# Altium PCB PCB1.PcbDoc
Units mil, origin at the board's own origin, x right, y up, seen from the top; angles counter-clockwise.
Board outline 3015.03 x 3555.03 mil, 2 copper layers (Top Layer, Bottom Layer); 31 components, 31 nets, 145 pads, 24 vias.
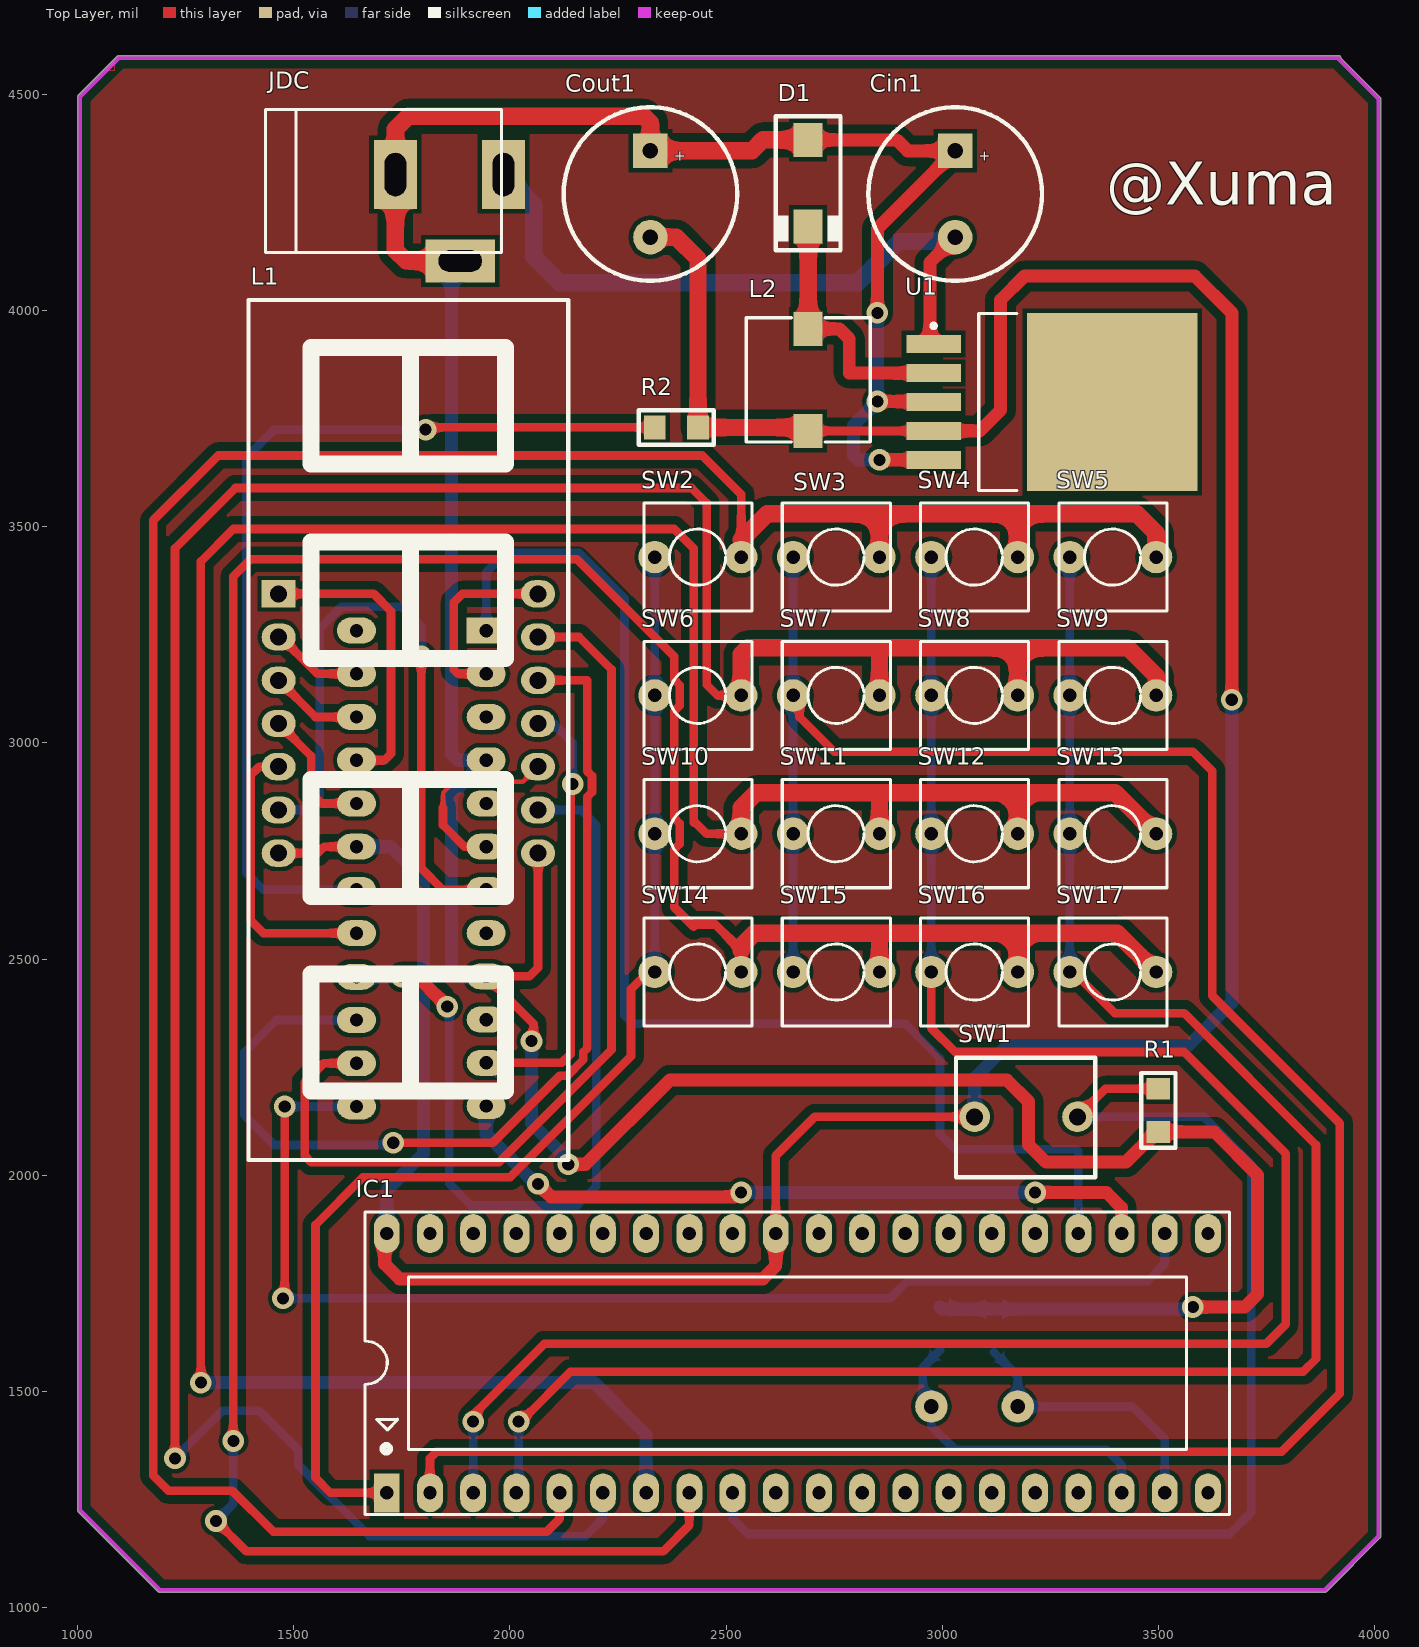
[diagram p0: Top Layer view]
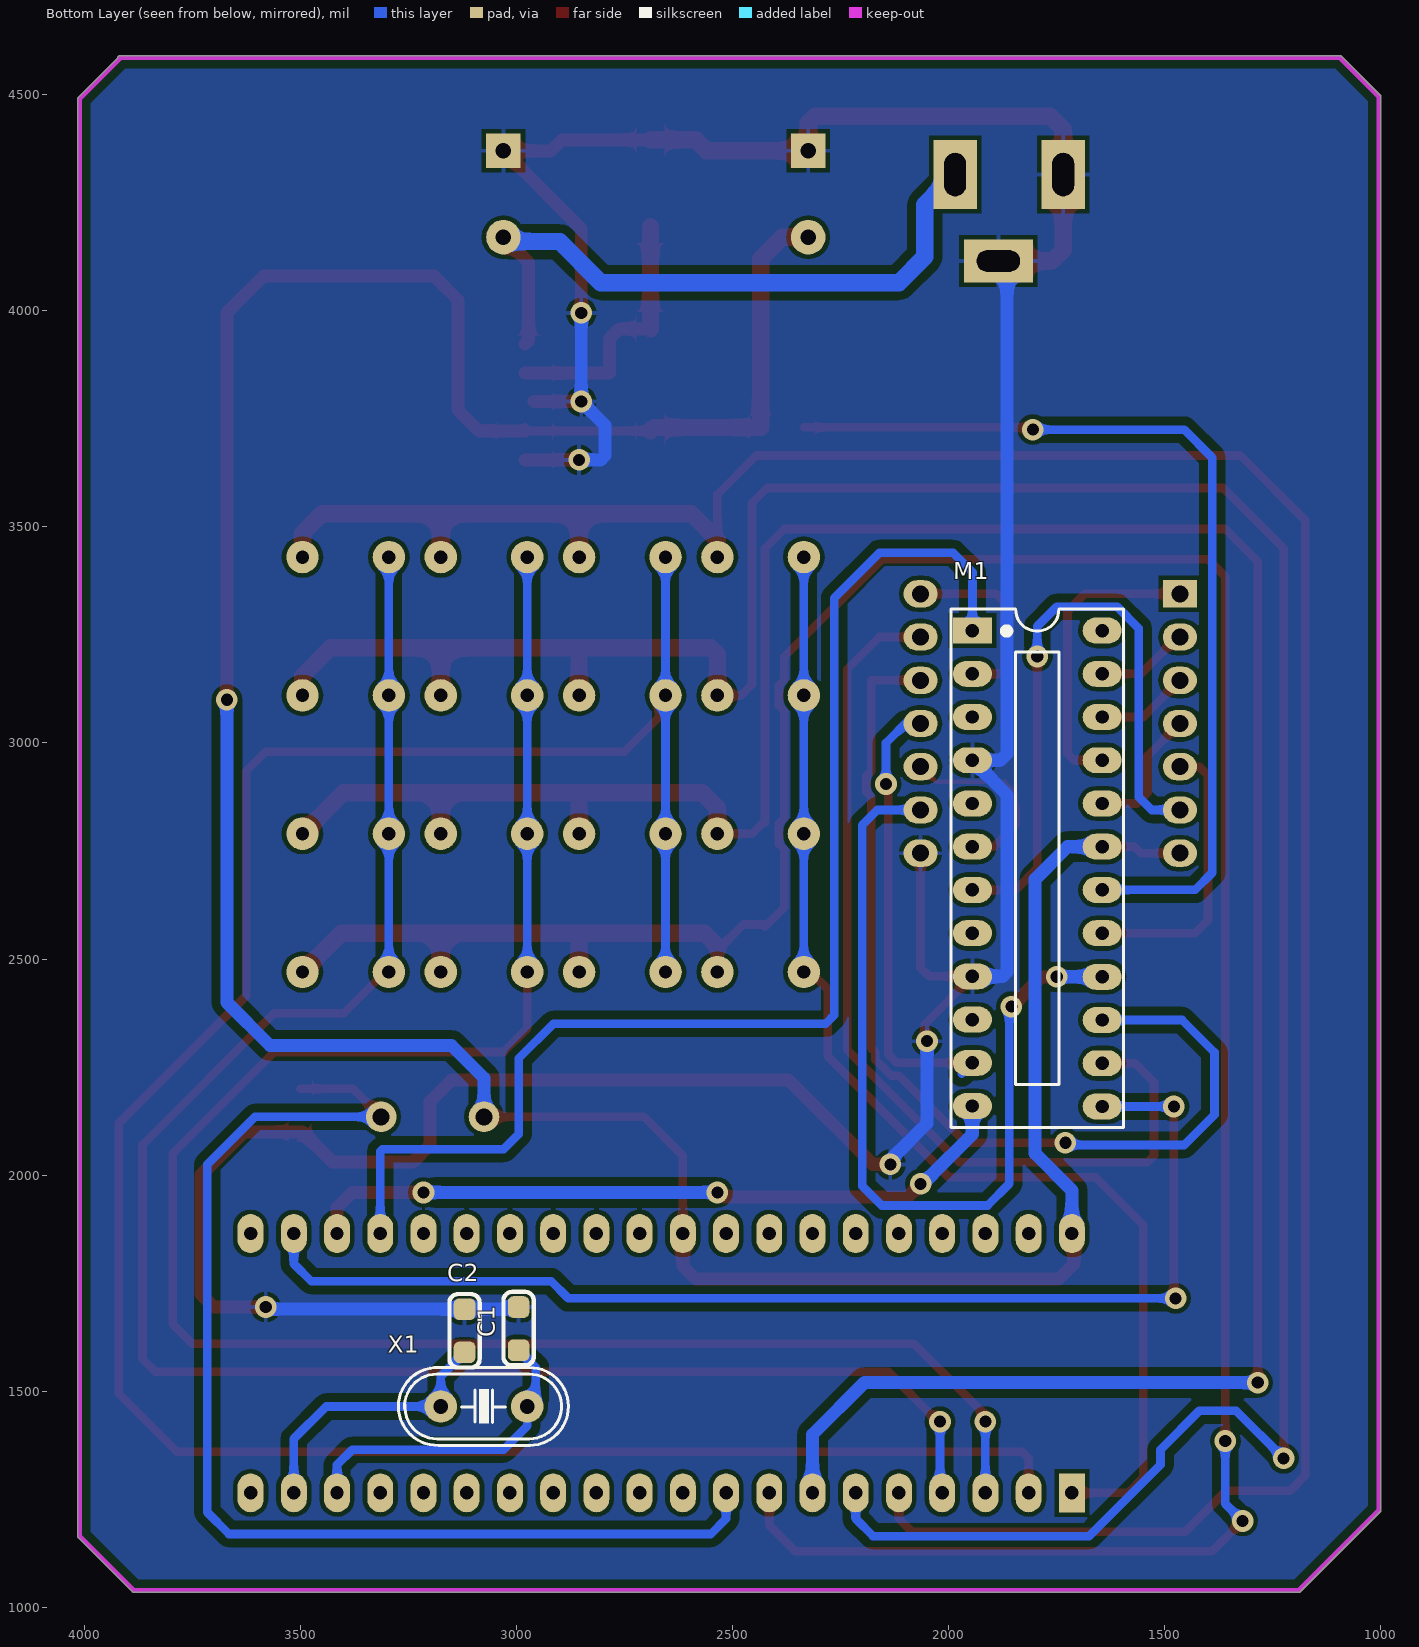
[diagram p1: Bottom Layer view, seen from below]

## Layer stack, top to bottom
Top Solder: solder mask 0.4, Solder Resist, Dk 3.5
Top Layer: signal copper 1.4
Dielectric 1: dielectric 12.6, FR-4, Dk 4.8
Bottom Layer: signal copper 1.4
Bottom Solder: solder mask 0.4, Solder Resist, Dk 3.5

## Board outline
1001.47,1221.44 cw(c1005,1225) 999.99,1225 999.98,4495 cw(c1005,4495) 1001.48,4498.57 1001.45,4498.55 1091.45,4588.55 1091.44,4588.53 cw(c1095,4585) 1095,4590.02 3917.5,4590.02 cw(c3917.5,4585) 3922.51,4585 cw(c3917.5,4585) 3922.5,4584.59 4013.55,4493.55 4013.53,4493.56 cw(c4010,4490) 4015.01,4490 4015.01,1165 cw(c4010,1165) 4013.53,1161.44 4013.55,1161.45 3888.55,1036.45 3888.56,1036.47 cw(c3885,1040) 3885,1034.98 1190,1034.98 cw(c1190,1040) 1186.44,1036.47 1186.45,1036.45

## Design rules (kind name [scope] priority, off if disabled: settings)
Clearance [All] p1: gap=10 ignorepadtopadclearanceinfootprint=FALSE except(0: Arc-Hole Track-Hole SMDPad-Hole THPad-Hole Via-Hole Fill-Hole Poly-Hole Region-Hole Text-Hole; 7: Arc-Arc Arc-Track Arc-SMDPad Track-Track Track-SMDPad; 20: Arc-Fill Arc-Poly Arc-Region Arc-Text Track-Fill Track-Poly Track-Region Track-Text SMDPad-Text THPad-Text Via-Text Fill-Text Poly-Text Region-Text Text-Text)
PolygonConnect [All] p1: connectstyle=Relief reliefconductorwidth=10 reliefentries=4 polygonreliefangle="90 Angle" airgapwidth=10
RoutingVias [All] p1: holewidth=28 width=50 viastyle="Through Hole" minholewidth=28 minwidth=50 maxholewidth=28 maxwidth=50
SolderMaskExpansion [All] p1: expansion=4
Width [All] p1: maxlimit=40 minlimit=10 preferedwidth=30
30 further rules are at their usual default settings.

## Classes and differential pairs
component class Designator: SW2 SW3 SW5 SW6 SW7 SW8 SW9 SW10 SW11 SW12 SW13 SW14 SW15 SW16 SW17
component class "[05] - POWER": Cin1 Cout1 D1 JDC L2 U1
component class "[03] - LED7SEG": L1 R2
component class "[02] - MCU": C1 C2 IC1 R1 SW1 X1

## Components (designator, comment, footprint, x,y, rotation, side; value= is the part's Value field where it differs from the comment)
C1 "22pF" CAP_0805 2995,1645 r270 bottom value=103
C2 "22pF" CAP_0805 3120,1640 r270 bottom value=103
Cin1 "680uF" CAP_D10 3030,4370 r270 top value=100pF
Cout1 "220uF" CAP_D10 2325,4370 r270 top value=100pF
D1 "1N5822" SMA 2690,4295.16 r270 top value="Diode c?m 1N5408"
IC1 "AT89C52" DIP40/W0.6 1715,1265 r0 top
JDC "Jac DC" DC-IN 1860,4215 r0 top
L1 "Led 7 Seg 4 digit - Anode" LED7SEG-4-0.56-RG 1760,3025 r270 top
L2 "33uH" L-SMD-M-7.3x4.5 2690,3840 r0 top value="150 mH"
M1 "MAX7219ENG" DIP24/W0.3 1945,3260 r270 bottom
R1 "10k" RES_SMD_0805 3500,2150 r90 top value="R1W - 100"
R2 "10k" RES_SMD_0805 2385,3730 r0 top value="R1/4W - 1K"
SW1 "SW-2P-S" SW-2P-S 3313,2035 r180 top
SW2 "SW" SW2 2335,3430 r0 top value="SW chip 2 pin"
SW3 "SW" SW2 2655,3430 r0 top value="SW chip 2 pin"
SW4 "SW" SW2 2975,3430 r0 top value="SW chip 2 pin"
SW5 "SW" SW2 3295,3430 r0 top value="SW chip 2 pin"
SW6 "SW" SW2 2335,3110 r0 top value="SW chip 2 pin"
SW7 "SW" SW2 2655,3110 r0 top value="SW chip 2 pin"
SW8 "SW" SW2 2975,3110 r0 top value="SW chip 2 pin"
SW9 "SW" SW2 3295,3110 r0 top value="SW chip 2 pin"
SW10 "SW" SW2 2335,2790 r0 top value="SW chip 2 pin"
SW11 "SW" SW2 2655,2790 r0 top value="SW chip 2 pin"
SW12 "SW" SW2 2975,2790 r0 top value="SW chip 2 pin"
SW13 "SW" SW2 3295,2790 r0 top value="SW chip 2 pin"
SW14 "SW" SW2 2335,2470 r0 top value="SW chip 2 pin"
SW15 "SW" SW2 2655,2470 r0 top value="SW chip 2 pin"
SW16 "SW" SW2 2975,2470 r0 top value="SW chip 2 pin"
SW17 "SW" SW2 3295,2470 r0 top value="SW chip 2 pin"
U1 "LM2976" TO-263 3216.22,3788.82 r0 top
X1 "12Mhz" XT2 3075,1465 r180 bottom value=4Mhz

## Footprints (in the part's own frame and the unit in brackets; to place one, negate y for a bottom-side part, rotate by r counter-clockwise, add the part's x,y. Pads: shape width x height; smd on the part's side, far side on the other; paste and mask are expansions set on the pad)
CAP_0805 [mil]
  rrect50% 50x50 smd: 1(-50,0) 2(50,0)
  silkscreen extent -85,-35 85,35, body extent -40,-25 40,25, height 24
CAP_D10 [mil]
  rect 80x80 hole 36: 1(0,0)
  round 80 hole 36: 2(200,0)
  silkscreen extent -101,-201 301,201, body extent -107,-207 307,207, height 551
DC-IN [mil] "Jac DC input"
  rect 100x160 hole 50 slot 100 at 90 deg: 1(125,100) 2(-125,100)
  rect 160x100 hole 50 slot 100 at 0 deg: 3(25,-100)
  silkscreen extent -425,-80 120,250, body extent -410,-105 134,269, height 434
DIP24/W0.3 [mil] "DIP24/W.300, Pin to pin 100mil"
  rect 60x90 hole 31: 1(0,0)
  oval 60x90 hole 31: 2(100,0) 3(200,0) 4(300,0) 5(400,0) 6(500,0) 7(600,0) 8(700,0) 9(800,0) 10(900,0) 11(1000,0) 12(1100,0) 13(1101,300) 14(1001,300) 15(901,300) 16(801,300) 17(700,300) 18(600,300) 19(500,300) 20(400,300) 21(300,300) 22(200,300) 23(100,300) 24(0,300)
  silkscreen extent -50,-50 1150,350, body extent -89,-3 1181,307, height 200
DIP40/W0.6 [mil] "40 PIN, W 600mil, Pin to pin 100mil"
  rect 60x90 hole 31: 1(0,0)
  oval 60x90 hole 31: 2(100,0) 3(200,0) 4(300,0) 5(400,0) 6(500,0) 7(600,0) 8(700,0) 9(800,0) 10(900,0) 11(1000,0) 12(1100,0) 13(1200,0) 14(1300,0) 15(1400,0) 16(1500,0) 17(1600,0) 18(1700,0) 19(1800,0) 20(1900,0) 21(1900,600) 22(1800,600) 23(1700,600) 24(1600,600) 25(1500,600) 26(1400,600) 27(1300,600) 28(1200,600) 29(1100,600) 30(1000,600) 31(900,600) 32(800,600) 33(700,600) 34(600,600) 35(500,600) 36(400,600) 37(300,600) 38(200,600) 39(100,600) 40(0,600)
  silkscreen extent -50,-50 1950,650, body extent -82,-10 1982,600, height 224
L-SMD-M-7.3x4.5 [mm] "WE-PDA SMD Shielded Power Inductor, 7345"
  rect 1.7x2 smd: 1(0,3) 2(0,-3)
  silkscreen extent -3.65,-3.65 3.65,3.65, body extent -3.65,-3.65 3.65,3.65, height 4.05
LED7SEG-4-0.56-RG [mil]
  round 60 on Top Overlay: 0(-535,-205) 0(-85,-205) 0(465,-205) 0(915,-205)
  round 118.11 on Top Overlay: 0(-20,155) 0(-20,-95)
  rect 62.99x78.74 hole 39.37: 1(-320,-295)
  oval 62.99x78.74 hole 39.37: 2(-220,-295) 3(-120,-295) 4(-20,-295) 5(80,-295) 6(180,-295) 7(280,-295) 8(280,305) 9(180,305) 10(80,305) 11(-20,305) 12(-120,305) 13(-220,305) 14(-320,305)
  silkscreen extent -1000,-365 990,375, body extent -995,-370 985,378, height 565
RES_SMD_0805 [mil]
  rect 50x55 smd: 1(-50,0) 2(50,0)
  silkscreen extent -87,-40 87,39, body extent -45,-27 45,27, height 30
SMA [mm]
  rect 2x1.7 smd: 1(-2.544,0) 2(2.544,0)
  silkscreen extent -3.94,-1.9 3.94,1.91, body extent -2.87,-1.4 2.87,1.4, height 2.29
SW2 [mil] "SW button 2pin, 250x 250 mil"
  round 75 hole 31: 1(0,0) 2(200,0)
  silkscreen extent -25,-125 225,125
SW-2P-S [mm]
  round 1.8 hole 1: 1(0,-2.54) 2(6.045,-2.54)
  silkscreen extent -1.04,-6.02 7.14,1.02
TO-263 [mm]
  rect 3.2x1.05 smd: 1(-6,3.4) 2(-6,1.7) 3(-6,0) 4(-6,-1.7) 5(-6,-3.4)
  rect 10x10.45 smd: 6(4.5,0)
  silkscreen extent -6.12,-5.2 -1.1,5.2, body extent -6.58,-5.2 7.57,5.2, height 4.65
XT2 [mil] "Footpin for Crystal 2 pin"
  round 75 hole 34: 1(-100,0) 2(100,0)
  silkscreen extent -198,-90 195,90, body extent -233,-93 213,90, height 138

## Part data
C1 C2: library part C, "Cap SMD"
Cin1 Cout1: library part CAP, "Cap np  1pF - 472pF"
D1: "Schottky Rectifiers"
IC1: "Atmel AT89C52, 8k Byte Flash Memory , 40 Pin"
JDC: library part DCIN, "Jac DC input"
L1: library part LED7SEG-4-RG
L2: library part Inductor, "Inductor"
M1: "Serially Interfaced, 8-Digit LED Display Driver", Code_JEDEC=MS-001-AF, ComponentLink1Description="Manufacturer Link", ComponentLink1URL=http://www.maxim-ic.com/, ComponentLink2Description=Datasheet, ComponentLink2URL=http://pdfserv.maxim-ic.com/en/ds/MAX7219-MAX7221.pdf, DatasheetVersion=Jul-1997, LatestRevisionDate=29-May-2009, LatestRevisionNote="Component Body Added.", PackageDescription="DIP, 24-Pin, Row Spacing 7.62 mm, Pitch 2.54 mm", PackageReference=NG24A, PackageVersion=1997, Published=16-Jan-2001, Publisher="Altium Limited"
R1: library part R1W, "Resistor 1W"
R2: library part R1/4W, "Resistor 1/4W"
SW1: library part SW-2PIN-SMALL, "Switch Small 2 Pin", LatestRevisionDate=17-Jul-2002, LatestRevisionNote="Re-released for DXP Platform.", PackageReference=SPST-2, Published=24-Mar-1999, Publisher="Altium Limited"
SW2 SW3 SW4 SW5 SW6 SW7 SW8 SW9 SW10 SW11 SW12 SW13 SW14 SW15 SW16 SW17: library part SW2, "Switch button 2 pin"
U1: library part LM2596, Max Input Voltage="12 V", Max Output Current="3 (6.0 peak) A", Max Output Voltage=mV, Temperature Range="-40 to +125 degC", Category=IC-Power, Min Input Voltage=mV, Min Output Voltage=mV, Mounting Technology="Surface Mount", Status=Unreleased, Supply Voltage=mV
X1: library part XT2, "Crystal For all Crystal 2pin."

## Via types
v1: diameter 50, hole 28, Top Layer to Bottom Layer, 24 vias

## Nets (pads, with @x,y where several pads share a name; then routed paths per layer and width w, separated by ;. In a path a pad name is that pad's centre, name@x,y a point inside that pad or via, vN(x,y) a via of type N, cw(c..) or ccw(c..) an arc to the next point about the centre after c; other vN are vias at no path point)
+5: Cout1.2 IC1.31 IC1.40 L1.7 L2.2 M1.19 R2.2 SW1.2 U1.4 | length 7434.5
  Top Layer w20: L1.7 1555,2745 1570,2760 M1.19 M1.19@1665,2760 ; IC1.31 2615,2045 2705,2135 SW1.2 ; L2.2 2971.89,3721.89 U1.4@2980,3730
  Top Layer w30: IC1.40 1710,1865 1710,1795 1745,1760 2585,1760 2615,1790 IC1.31 ; U1.4 3086.89,3721.89 3135,3770 3135,4025 3190,4080 3585,4080 3670,3995 v1@3670,3120
  Top Layer w40: Cout1.2 2385,4170 2435,4120 R2.2 2681.89,3730 L2.2
  Bottom Layer w30: M1.19 1725,2760 1800,2685 1800,2050 1715,1965 IC1.40 ; SW1.2 3075,2225 3150,2300 3570,2300 3670,2400 v1(3670,3100)
D0: L1.14 M1.2 | length 437.4
  Top Layer w20: M1.2 1880,3160 1870,3170 1870,3325 1890,3345 L1.14
D1: L1.11 M1.11 | length 1059.4
  Top Layer w20: M1.11 2120,2260 2140,2280 2140,2900 v1(2145,2905)
  Bottom Layer w20: M1.11 M1.11@1970,2235 ; L1.11 2100,3045 2145,3000 v1(2145,2905)
D2: L1.10 M1.6 | length 440.6
  Top Layer w10: 1845,2850 1845,2885 1870,2910 2030,2910 L1.10
  Top Layer w20: 1845,2850 1845,2810 1895,2760 M1.6
D3: L1.6 M1.7 | length 1477.5
  Top Layer w20: v1(1795,3200) 1795,2710 1845,2660 M1.7
  Bottom Layer w20: L1.6 1530,2845 1560,2875 1560,3265 1610,3315 1750,3315 1795,3270 1795,3225
GND: C1.1 C2.1 Cin1.1 Cout1.1 D1.1 JDC.2 JDC.3 L1.8 M1.4 M1.9 R1.1 U1.3 U1.5 | length 8524
  Top Layer w20: v1@2055,2325 2055,2350 M1.9 2045,2460 2065,2480 L1.8
  Top Layer w30: v1(2135,2025) 2175,2025 2370,2220 3150,2220 3200,2170 3200,2070 3240,2030 3425,2030 3495,2100 R1.1 3630,2100 3730,2000 3730,1725 3700,1695 v1@3600,1695 ; D1.1 2894.69,4395.31 2920,4370 Cin1.1 2850,4190 v1(2850,3995) ; v1(2850,3790) U1.3@2958.82,3790 ; v1(2854.96,3654.96) U1.5
  Top Layer w40: JDC.3 1760,4115 1735,4140 JDC.2 1735,4420 1765,4450 2310,4450 2325,4435 Cout1.1 2560,4370 2585.31,4395.31 D1.1
  Bottom Layer w30: JDC.3 1865,4095 1865,2975 1880,2960 M1.4 1865,2880 1865,2470 1875,2460 M1.9 ; v1(2050,2310) 2050,2120 v1@2125,2045 ; v1@2850,3659.92 v1(2854.96,3654.96) 2805,3654.96 2795,3664.96 2795,3735 v1(2850,3790) ; 2850,3815 v1(2850,3995) ; C1.1 3000,1690 C2.1 3575,1690 v1(3580,1695)
NetC1_2: C1.2 IC1.18 X1.2 | length 742.1
  Bottom Layer w20: C1.2 2955,1555 2955,1485 X1.2 2975,1420 3030,1365 3380,1365 3415,1330 IC1.18
NetC2_2: C2.2 IC1.19 X1.1 | length 643.8
  Bottom Layer w20: C2.2 3175,1535 X1.1 3440,1465 3515,1390 IC1.19
NetCin1_2: Cin1.2 JDC.1 U1.1 | length 1537.1
  Top Layer w30: U1.1 2971.89,3930.79 2971.89,4111.89 Cin1.2
  Bottom Layer w40: JDC.1 2055,4245 2055,4125 2115,4065 2805,4065 2900,4160 3020,4160 Cin1.2
NetD1_2: D1.2 L2.1 U1.2 | length 615.7
  Top Layer w30: L2.1 2761.89,3958.11 2785,3935 2785,3855.75 U1.2
  Top Layer w40: L2.1 D1.2
NetIC1_1: IC1.1 SW2.1 SW6.1 SW10.1 SW14.1 | length 2842.6
  Top Layer w20: IC1.1 1585,1265 1550,1300 1550,1885 1660,1995 2000,1995 2280,2275 2280,2430 2320,2470 SW14.1
  Bottom Layer w20: SW14.1 SW10.1 SW6.1 SW2.1
NetIC1_2: IC1.2 SW3.1 SW7.1 SW11.1 SW15.1 | length 5832.3
  Top Layer w20: IC1.2 1815,1345 1830,1360 3785,1360 3920,1495 3920,2120 3625,2415 3625,2935 3580,2980 2750,2980 2670,3060 2670,3095 SW7.1
  Bottom Layer w20: SW15.1 SW11.1 SW7.1 SW3.1
NetIC1_3: IC1.3 SW4.1 SW8.1 SW12.1 SW16.1 | length 4564.2
  Top Layer w20: v1@1910,1440 2080,1610 3750,1610 3795,1655 3795,2050 3560,2285 3030,2285 2975,2340 SW16.1
  Bottom Layer w20: IC1.3 v1(1915,1430) ; SW16.1 SW12.1 SW8.1 SW4.1
NetIC1_4: IC1.4 SW5.1 SW9.1 SW13.1 SW17.1 | length 4250.7
  Top Layer w20: v1@2030,1435 2140,1545 3835,1545 3865,1575 3865,2070 3560,2375 3399,2375 3304,2470 SW17.1
  Bottom Layer w20: IC1.4 2020,1270 v1(2020,1430) ; SW17.1 SW13.1 SW9.1 SW5.1
NetIC1_5: IC1.5 SW2.2 SW3.2 SW4.2 SW5.2 | length 6099.2
  Top Layer w20: IC1.5 2115,1205 2085,1175 1452.74,1175 1357.74,1270 1210,1270 1175,1305 1175,1480 1175,3515 1325,3665 2445,3665 2535,3575 2535,3470
  Top Layer w40: 2535,3470 2595,3530 2855,3530 ; SW3.2 2855,3530 ; SW4.2 3175,3530 ; SW5.2 3495,3485 3450,3530 3175,3530 ; 2855,3530 3175,3530
NetIC1_6: IC1.6 SW6.2 SW7.2 SW8.2 SW9.2 | length 6525.8
  Top Layer w20: v1(1225,1345) 1225,3450 1365,3590 2420,3590 2455,3555 2455,3135 2480,3110 SW6.2
  Top Layer w40: SW6.2 2535,3205 2550,3220 2860,3220 ; SW7.2 2855,3215 2860,3220 ; SW8.2 3175,3220 ; SW9.2 3495,3155 3430,3220 3175,3220 ; 2860,3220 3175,3220
  Bottom Layer w20: v1(1225,1345) 1335,1455 1420,1455 1510,1365 1510,1330 1675,1165 2175,1165 2215,1205 IC1.6
NetIC1_7: IC1.7 SW10.2 SW11.2 SW12.2 SW13.2 | length 6325.7
  Top Layer w20: v1(1285,1520) 1285,3420 1360,3495 2380,3495 2425,3450 2425,2815 2430,2815 2455,2790 SW10.2
  Top Layer w40: SW10.2 2535,2850 2570,2885 2860,2885 ; SW11.2 2855,2880 2860,2885 ; SW12.2 3175,2885 ; SW13.2 3400,2885 3175,2885 ; 2860,2885 3175,2885
  Bottom Layer w30: v1(1285,1520) 2195,1520 2315,1400 IC1.7
NetIC1_8: IC1.8 SW14.2 SW15.2 SW16.2 SW17.2 | length 6613.2
  Top Layer w20: v1(1320,1200) 1390,1130 2355,1130 2415,1190 IC1.8 ; v1(1360,1385) 1360,3385 1400,3425 2155,3425 2380,3200 2380,3146.32 2392.5,3133.82 2392.5,3086.18 2380,3073.68 2380,2826.32 2392.5,2813.82 2392.5,2766.18 2380,2753.68 2380,2620 2425,2575 2425,2580 2475,2580 2535,2520 SW14.2
  Top Layer w40: 2535,2520 2535,2530 2565,2560 2845,2560 ; SW15.2 2855,2550 2845,2560 ; SW16.2 3175,2560 ; SW17.2 3405,2560 3175,2560 ; 2845,2560 3175,2560
  Bottom Layer w20: v1(1320,1200) 1360,1240 v1(1360,1385)
NetIC1_9: IC1.9 R1.2 SW1.1 | length 2761.7
  Top Layer w20: SW1.1 3378,2200 R1.2
  Bottom Layer w20: IC1.9 2515,1205 2550,1170 3665,1170 3715,1220 3715,2025 3605,2135 SW1.1
NetIC1_22: IC1.22 M1.13 | length 2740.6
  Top Layer w20: v1@1479,1729 v1(1479,2159)
  Bottom Layer w20: v1(1475,1715) 2880,1715 2920,1755 3475,1755 3515,1795 IC1.22 ; v1(1479,2159) M1.13 M1.13@1644,2160
NetIC1_23: IC1.23 M1.12 | length 1608.3
  Top Layer w30: v1(2065,1980) 2095,1950 v1@2520,1950 ; v1@3210,1960 v1(3215,1960) 3380,1960 3415,1925 IC1.23
  Bottom Layer w30: M1.12 1945,2095 2045,1995 ; v1(2535,1960) v1@3190,1960
NetIC1_24: IC1.24 M1.1 | length 2955.1
  Bottom Layer w20: M1.1 1945,3395 1990,3440 2160,3440 2265,3335 2265,2370 2285,2350 2915,2350 2995,2270 2995,2095 3030,2060 3310,2060 3315,2055 IC1.24
NetL1_1: L1.1 M1.21 | length 692.8
  Top Layer w20: L1.1 1685,3345 1725,3305 1725,2975 1710,2960 M1.21
NetL1_2: L1.2 M1.23 | length 215.2
  Top Layer w20: L1.2 1470,3245 1555,3160 M1.23
NetL1_3: L1.3 M1.22 | length 215.2
  Top Layer w20: L1.3 1550,3060 M1.22
NetL1_4: L1.4 M1.20 | length 306.4
  Top Layer w20: L1.4 1540,2970 1540,2885 1565,2860 M1.20
NetL1_5: L1.5 M1.17 | length 665.7
  Top Layer w20: L1.5 1420,2945 1400,2925 1400,2590 1430,2560 M1.17
NetL1_9: L1.9 M1.16 | length 1979.3
  Top Layer w30: v1(1750,2459) 1786,2459 v1@1840,2405
  Bottom Layer w20: v1(1855,2390) 1860,2385 1860,1980 1910,1930 2155,1930 2200,1975 2200,2810 2165,2845 L1.9
  Bottom Layer w30: M1.16 v1@1736,2459
NetL1_12: L1.12 M1.15 | length 2335.1
  Top Layer w20: v1(1730,2075) 1960,2075 2115,2230 2132.43,2230 2170,2267.57 2170,2285 2178.82,2293.82 2178.82,2875.18 2190,2886.36 2190,2923.64 2178.82,2934.82 2178.82,3145 L1.12
  Bottom Layer w20: M1.15 1460,2359 1385,2284 1385,2140 1455,2070 1725,2070 v1(1730,2075)
NetL1_13: L1.13 M1.14 | length 2213.1
  Top Layer w20: M1.14 1569,2259 1525,2215 1525,2045 1540,2030 1974.85,2030 2235,2290.15 2235,3170 2160,3245 L1.13
NetM1_18: M1.18 R2.1 | length 2193.5
  Top Layer w20: v1@1815,3730 R2.1
  Bottom Layer w20: M1.18 1430,2660 1390,2700 1390,3660 1455,3725 v1(1805,3725)
pads on no net: IC1.10 IC1.11 IC1.12 IC1.13 IC1.14 IC1.15 IC1.16 IC1.17 IC1.20 IC1.21 IC1.25 IC1.26 IC1.27 IC1.28 IC1.29 IC1.30 IC1.32 IC1.33 IC1.34 IC1.35 IC1.36 IC1.37 IC1.38 IC1.39 L1.0 M1.3 M1.5 M1.8 M1.10 M1.24 U1.6

## Polygon pours and split planes (outlines as drawn)
no net on Top Layer "GND_BOTTOM" (solid, pour order 4): 1100,4585 1075,4585 995,4505 995,1235 1190,1040 3900,1040 4015,1155 4015,4505 4000,4505 3910,4595 1100,4595 1090,4605 1085,4600
no net on Top Layer "GND_BOTTOM" (solid, pour order 2): 1085,4575 1085,4555 1065,4555
no net on Top Layer "GND_BOTTOM" (solid, pour order 0): 1355,3985
GND on Bottom Layer "GND_BOTTOM" (solid, pour order 6): 1105,4585 1090,4585 1010,4505 1010,1215 1200,1025 1215,1040 3900,1040 4025,1165 4015,1175 4015,4500 3920,4595 1095,4595 1095,4605 1100,4600 1100,4590

## Keep-outs
Keep-Out Layer:
  lines w10: 3917.5,4582.5 4010,4490 4010,1165 3885,1040 1190,1040 1005,1225 1005,4495 1095,4585 3917.5,4585

## Silkscreen, mask and mechanical layers (free items; w line width, h text height)
Top Overlay:
  text "@Xuma" at 3380,4245 h100

## Text inside footprints (layer, text, board x,y; h text height)
Cin1: Top Overlay "+" at 3085,4339 h40
Cout1: Top Overlay "+" at 2380,4339 h40